# Altium PCB HLK-TX510_2.8_KIT_V1.1.PcbDoc (part 1 of 2)
Units mm, origin at the board's own origin, x right, y up, seen from the top; angles counter-clockwise.
Board outline 64 x 95.97 mm, 4 copper layers (Top Layer, GND, PWR, Bottom Layer), stack 0.537 mm thick; 97 components, 82 nets, 456 pads, 366 vias.
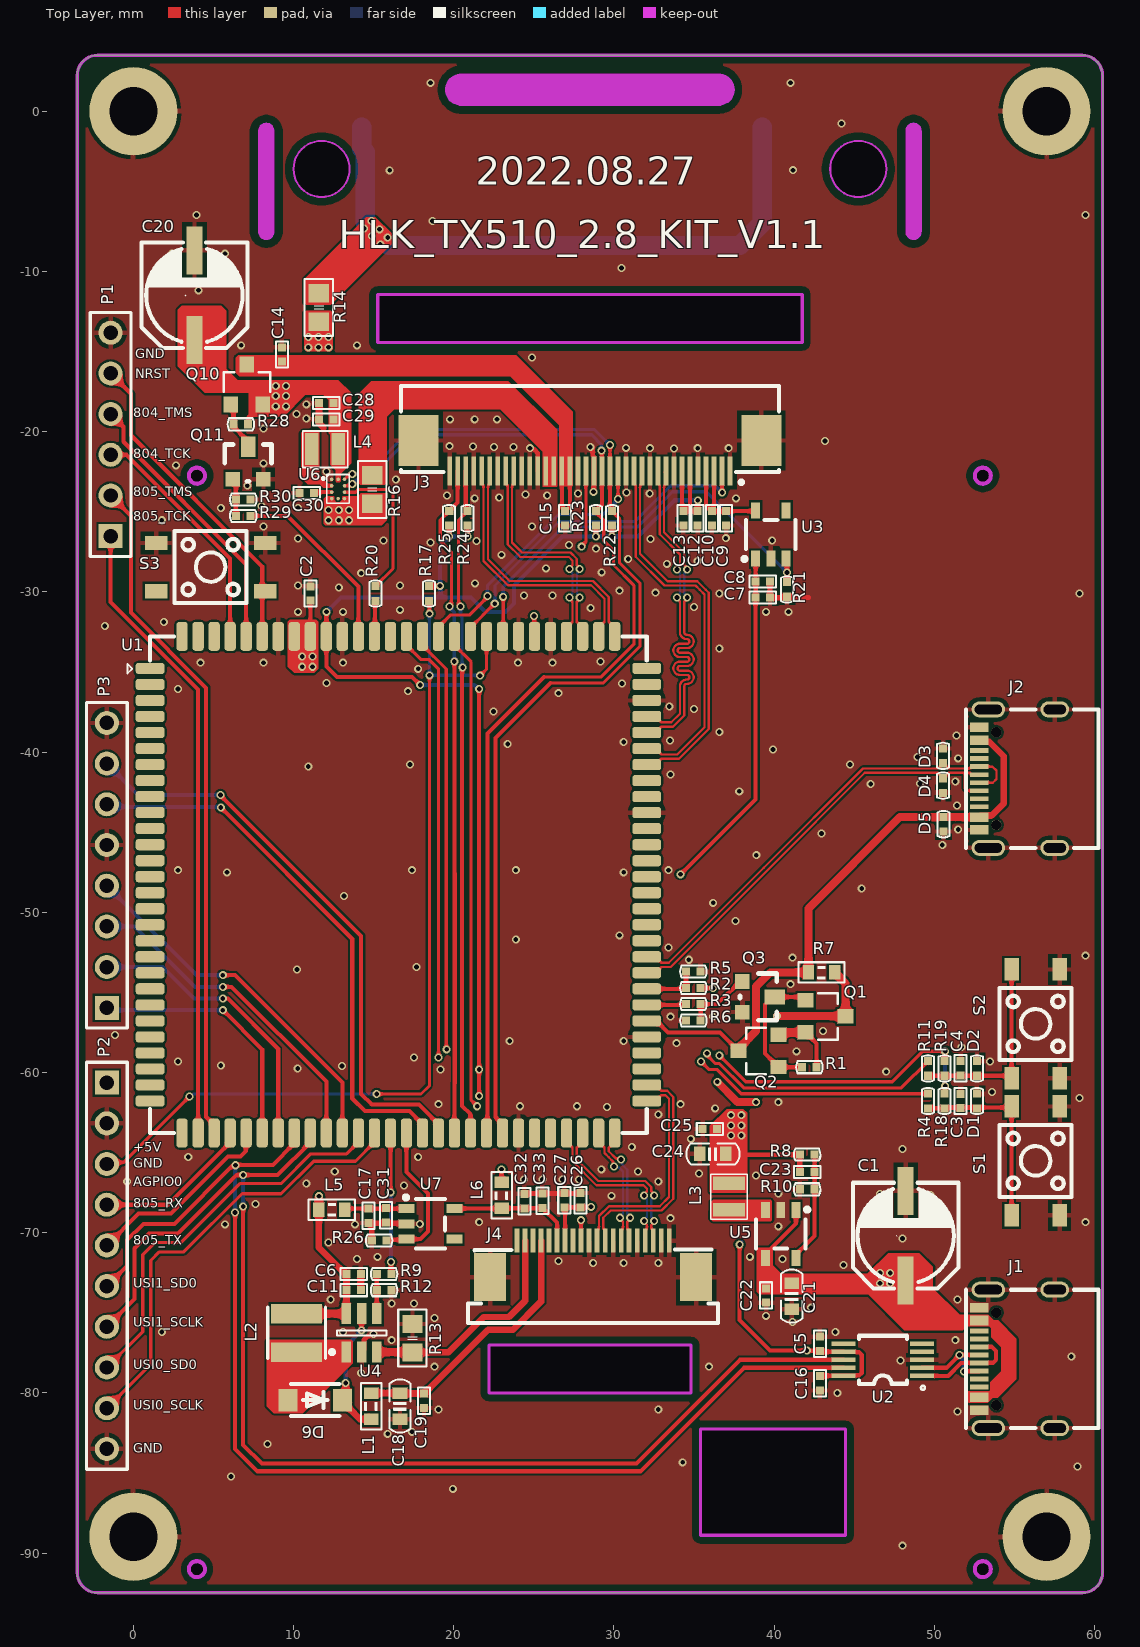
[diagram p0: Top Layer view]
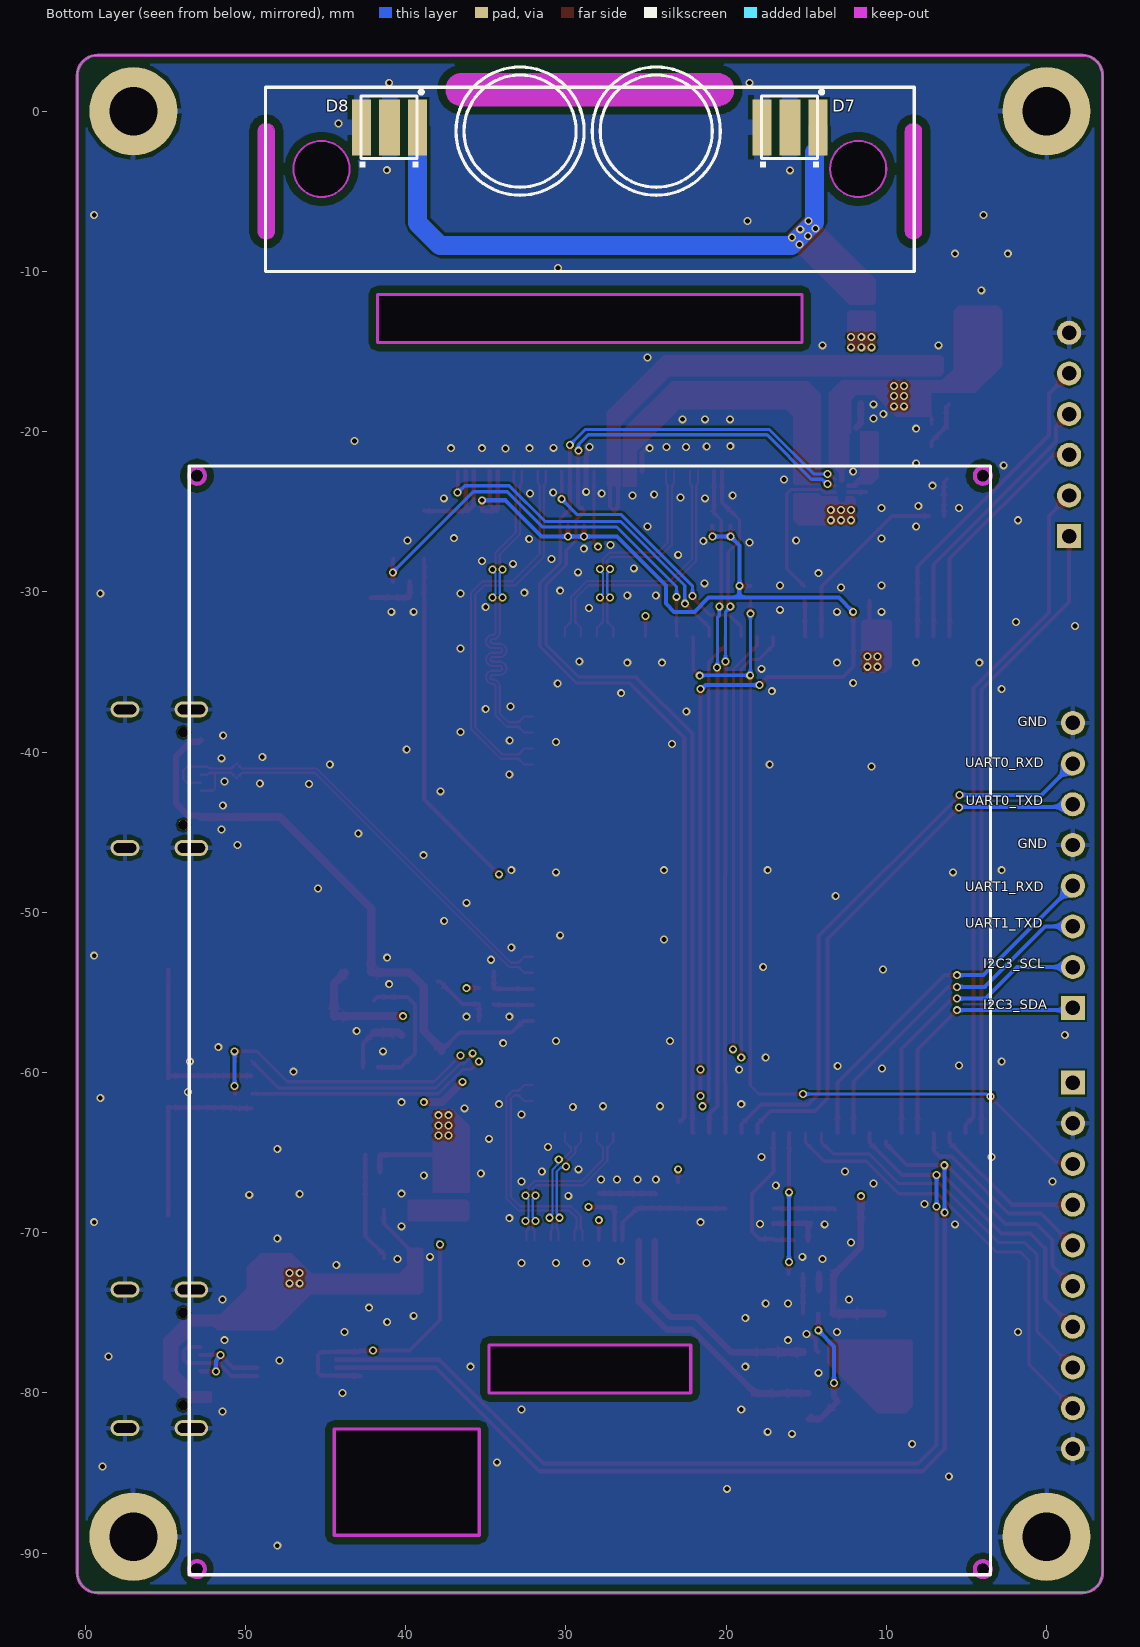
[diagram p1: Bottom Layer view, seen from below]
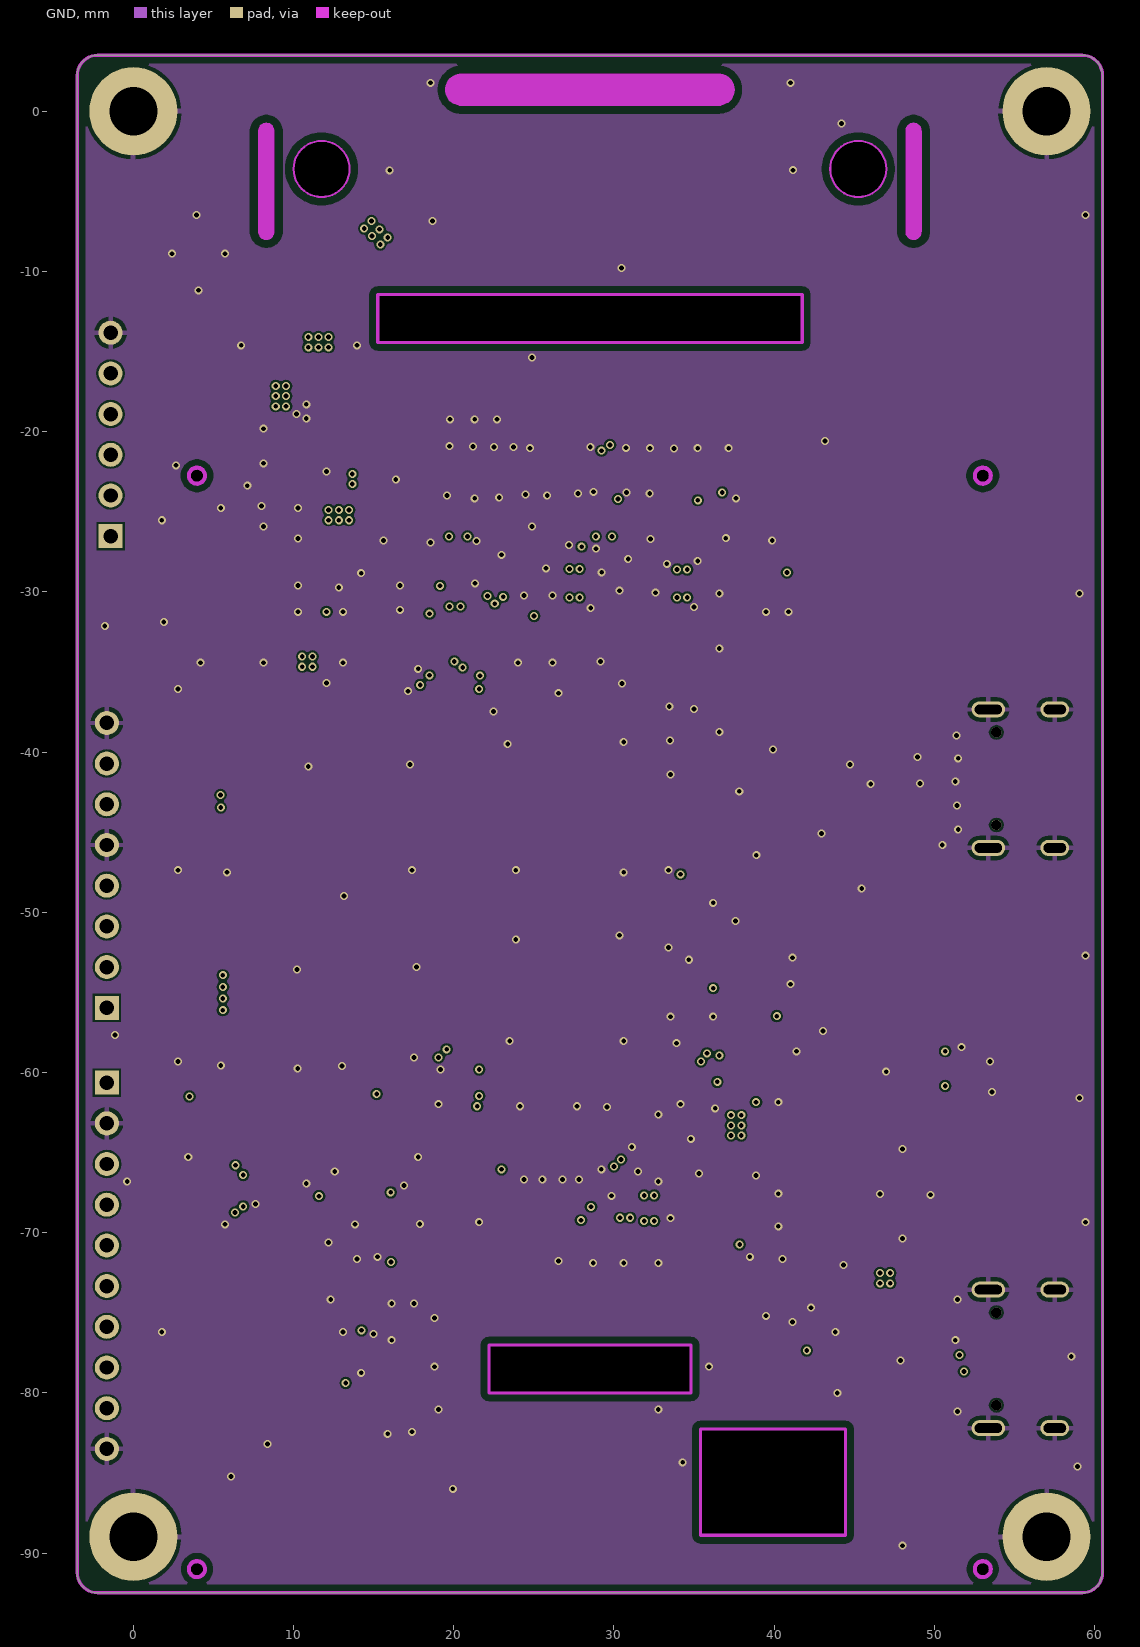
[diagram p2: GND]
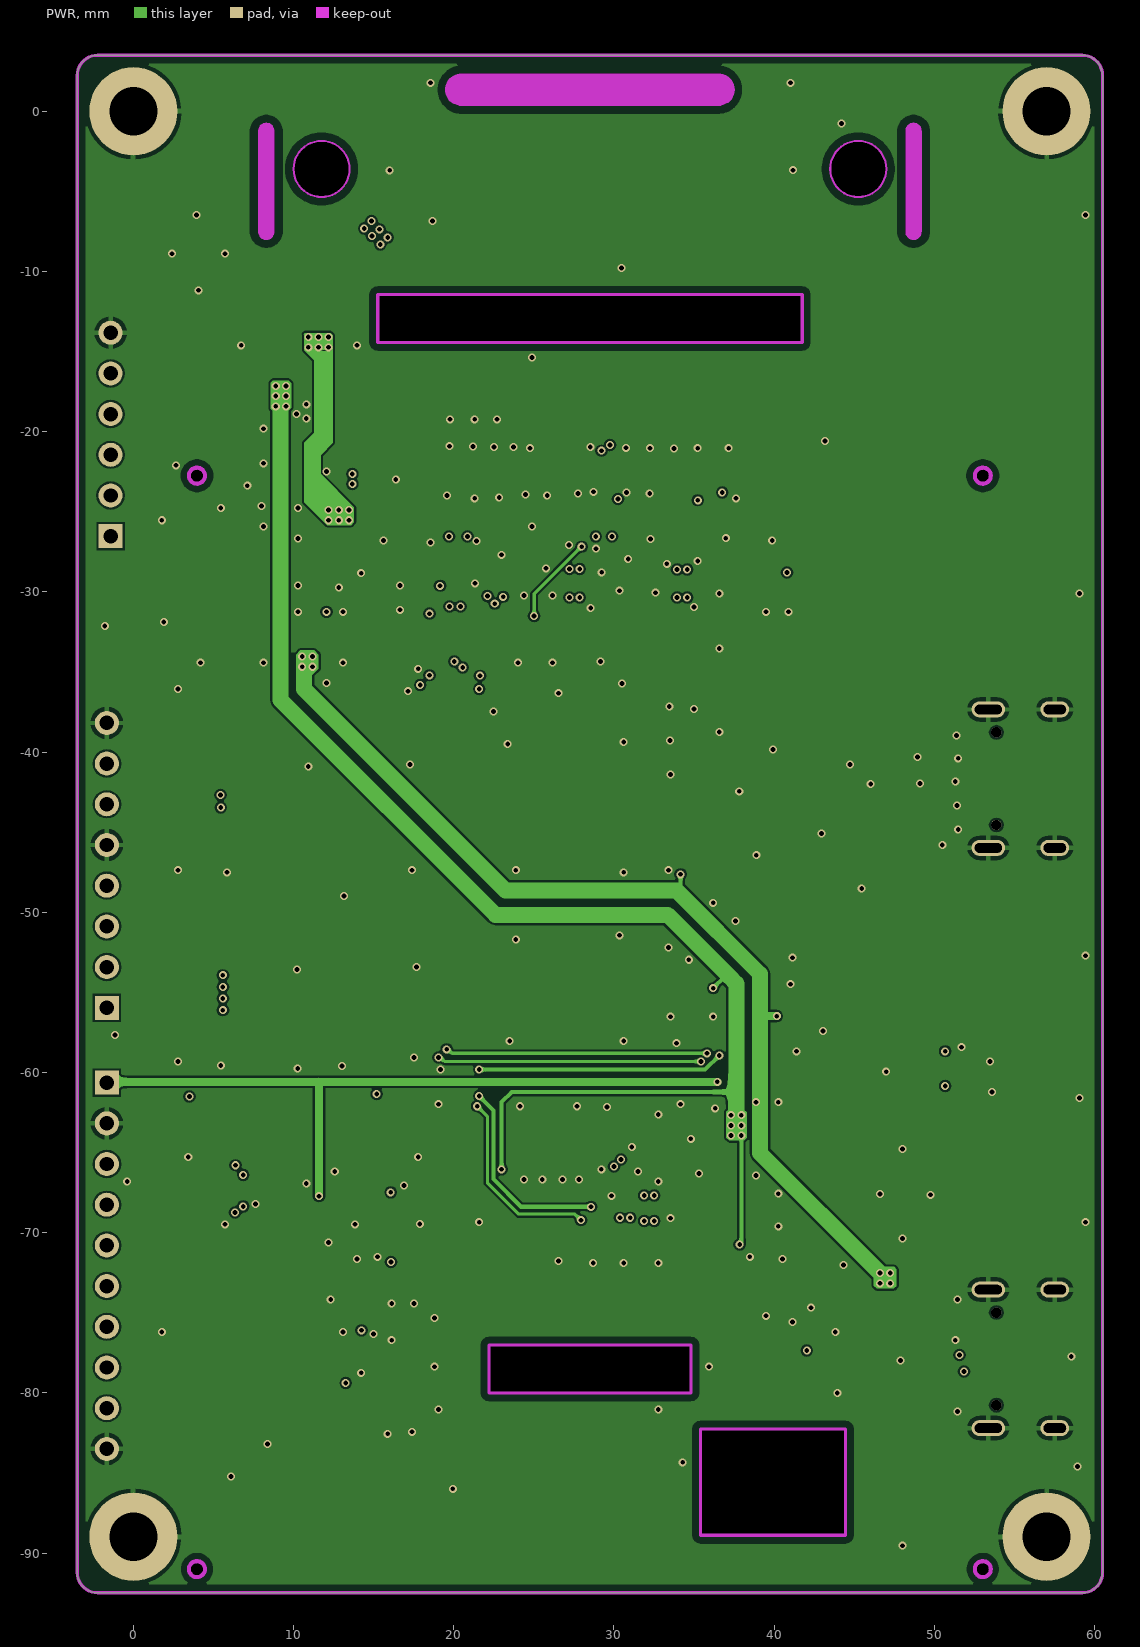
[diagram p3: PWR]

## Layer stack, top to bottom
Top Solder: solder mask 0.0102, Solder Resist, Dk 3.5
Top Layer: signal copper 0.0356
Dielectric 1: prepreg 0.0711, PP-006, Dk 4.1
GND: signal copper 0.035
Dielectric1: core 0.254, FR-4, Dk 4.2
PWR: signal copper 0.035
Dielectric 2: prepreg 0.0711, PP-006, Dk 4.1
Bottom Layer: signal copper 0.0356
Bottom Solder: solder mask 0.0102, Solder Resist, Dk 3.5

## Board outline
-3.502,-91.202 ccw(c-2.232,-91.202) -2.232,-92.472 59.228,-92.472 ccw(c59.228,-91.202) 60.498,-91.202 60.498,2.23 ccw(c59.228,2.23) 59.228,3.5 -2.232,3.5 ccw(c-2.232,2.23) -3.502,2.23
cut-out: 20.5,0.346 cw(c20.5,1.346) 20.5,2.347 36.5,2.347 cw(c36.5,1.346) 37.5,1.346 cw(c36.5,1.346) 36.5,0.346
cut-out: 43.5,-3.6 ccw(c45.25,-3.6) 45.25,-5.35 ccw(c45.25,-3.6) 47,-3.6 ccw(c45.25,-3.6) 45.25,-1.85 ccw(c45.25,-3.6)
cut-out: 10,-3.6 ccw(c11.75,-3.6) 11.75,-5.35 ccw(c11.75,-3.6) 13.5,-3.6 ccw(c11.75,-3.6) 11.75,-1.85 ccw(c11.75,-3.6)
cut-out: 48.2,-7.5 ccw(c48.7,-7.5) 49.2,-7.5 49.2,-1.25 ccw(c48.7,-1.25) 48.2,-1.25
cut-out: 7.8,-7.5 ccw(c8.3,-7.5) 8.8,-7.5 8.8,-1.25 ccw(c8.3,-1.25) 7.8,-1.25
cut-out: 3.473,-22.747 ccw(c3.973,-22.747) 3.973,-23.247 ccw(c3.973,-22.747) 4.473,-22.747 ccw(c3.973,-22.747) 3.973,-22.247 ccw(c3.973,-22.747)
cut-out: 52.523,-22.747 ccw(c53.023,-22.747) 53.023,-23.247 ccw(c53.023,-22.747) 53.523,-22.747 ccw(c53.023,-22.747) 53.023,-22.247 ccw(c53.023,-22.747)
cut-out: 3.473,-90.997 ccw(c3.973,-90.997) 3.973,-91.497 ccw(c3.973,-90.997) 4.473,-90.997 ccw(c3.973,-90.997) 3.973,-90.497 ccw(c3.973,-90.997)
cut-out: 52.523,-90.997 ccw(c53.023,-90.997) 53.023,-91.497 ccw(c53.023,-90.997) 53.523,-90.997 ccw(c53.023,-90.997) 53.023,-90.497 ccw(c53.023,-90.997)
cut-out: 22.2,-80.003 34.8,-80.003 34.8,-77.003 22.2,-77.003
cut-out: 35.4,-88.878 44.455,-88.878 44.455,-82.248 35.4,-82.248
cut-out: 15.258,-14.433 41.748,-14.433 41.748,-11.433 15.258,-11.433

## Design rules (kind name [scope] priority, off if disabled: settings)
BoardOutlineClearance [All] p1: gap=0.254 ignorepadtopadclearanceinfootprint=FALSE except(0: Arc-SplitContinuation Track-SplitContinuation SMDPad-SplitContinuation THPad-SplitContinuation Via-SplitContinuation Fill-SplitContinuation Poly-SplitContinuation Region-SplitContinuation Text-SplitContinuation; 0.508: Poly-OutlineEdge Poly-CavityEdge Poly-CutoutEdge Poly-SplitBarrior)
Clearance 90ohm [InNet('GND') vs InNetClass('90ohm')] p1: gap=0.127 ignorepadtopadclearanceinfootprint=FALSE except(0: Arc-Hole Track-Hole SMDPad-Hole THPad-Hole Via-Hole Fill-Hole Poly-Hole Region-Hole Text-Hole)
Clearance 100ohm [InNet('GND') vs InNetClass('100ohm')] p2: gap=0.127 ignorepadtopadclearanceinfootprint=FALSE except(0: Arc-Hole Track-Hole SMDPad-Hole THPad-Hole Via-Hole Fill-Hole Poly-Hole Region-Hole Text-Hole)
Clearance POLY [All vs OnLayer('Keep-Out Layer')] p3: gap=0.254 ignorepadtopadclearanceinfootprint=FALSE except(0: Arc-Hole Track-Hole SMDPad-Hole THPad-Hole Via-Hole Fill-Hole Poly-Hole Region-Hole Text-Hole)
Clearance GND [All vs InNet('GND')] p4 off: gap=0.127 ignorepadtopadclearanceinfootprint=FALSE except(0: Arc-Hole Track-Hole SMDPad-Hole THPad-Hole Via-Hole Fill-Hole Poly-Hole Region-Hole Text-Hole)
Clearance [All] p5: gap=0.127 ignorepadtopadclearanceinfootprint=FALSE except(0: Arc-Hole Track-Hole SMDPad-Hole THPad-Hole Via-Hole Fill-Hole Poly-Hole Region-Hole Text-Hole)
ComponentClearance "'Default' PADS rule_12" [All] p1: gap=0 collisioncheckmode=3 verticalgap=0.254 showdistances=FALSE
DiffPairsRouting DiffPair_90_DiffPairsRouting [InNetClass('90ohm')] p1: maxlimit=0.127 minlimit=0.127 mostfreqgap=0.127 toplayer_minwidth=0.051 toplayer_maxwidth=0.2 toplayer_prefwidth=0.2 midlayer1_minwidth=0.051 midlayer1_maxwidth=0.14 midlayer1_prefwidth=0.14 midlayer2_minwidth=0.051 midlayer2_maxwidth=0.14 midlayer2_prefwidth=0.14 bottomlayer_minwidth=0.051 bottomlayer_maxwidth=0.2 bottomlayer_prefwidth=0.2 maxuncoupledlength=12.7
DiffPairsRouting DiffPair_100_DiffPairsRouting [InNetClass('100ohm')] p2: maxlimit=0.127 minlimit=0.127 mostfreqgap=0.127 toplayer_minwidth=0.051 toplayer_maxwidth=0.14 toplayer_prefwidth=0.14 midlayer1_minwidth=0.051 midlayer1_maxwidth=0.14 midlayer1_prefwidth=0.14 midlayer2_minwidth=0.051 midlayer2_maxwidth=0.14 midlayer2_prefwidth=0.14 bottomlayer_minwidth=0.051 bottomlayer_maxwidth=0.14 bottomlayer_prefwidth=0.14 maxuncoupledlength=12.7
FabricationTestpoint [(IsPad And (OnTopLayer Or OnBottomLayer))] p1: side=3 testpointundercomponent=TRUE minsize=1.016 maxsize=2.54 preferedsize=1.524 minholesize=0 maxholesize=1.016 preferedholesize=0.813 testpointgrid=0.025 allowsidetop=TRUE allowsidebottom=TRUE usegrid=TRUE gridtolerance=0
FlightTimeFalling "'Default' PADS rule_6" [All] p1: maximum=10.00
FlightTimeRising "'Default' PADS rule_5" [All] p1: maximum=10.00
HoleSize [All] p1 off: absolutevalues=TRUE maxlimit=1 minlimit=0.2 maxpercent=80.000 minpercent=20.000
HoleToHoleClearance [All] p1 off: gap=0.254 allowstackedmicrovias=TRUE
LayerPairs [All] p1 off: enforce=TRUE
Length "'Default' PADS rule" [All] p1 off: maxlimit=1270 minlimit=0
MatchedLengths DiffPair_USBMatchedLengths [InDifferentialPair ('USB')] p1: tolerance=0.254 checknetsindiffpair=TRUE checkdiffpairvsdiffpair=FALSE checkxsignals=FALSE checkothers=FALSE
MatchedLengths [InDifferentialPair ('USB')] p2: tolerance=25.4 checknetsindiffpair=TRUE checkdiffpairvsdiffpair=FALSE checkxsignals=FALSE checkothers=FALSE
MatchedLengths "'Default' PADS rule_7" [InNetClass('All Nets')] p3 off: tolerance=5.08 checknetsindiffpair=TRUE checkdiffpairvsdiffpair=FALSE checkxsignals=FALSE checkothers=FALSE
MaxMinImpedance "'Default' PADS rule_4" [All] p1: minimum=50.00 maximum=150.0
MinimumSolderMaskSliver [All] p1: minsoldermaskwidth=0
ParallelSegment "'Default' PADS rule_3" [All] p1 off: limit=25.4 gap=5.08
ParallelSegment "'Default' PADS rule_2" [All] p2 off: limit=25.4 gap=5.08
PlaneClearance "PLANE CLE" [All] p1: clearance=0.127
PlaneConnect PLANE [All] p1: planeconnectstyle=Direct reliefexpansion=0.508 reliefentries=4 reliefconductorwidth=0.508 reliefairgap=0.254
PolygonConnect PolygonConnect_J1 [All vs HasPad('J1-A1B12')or haspad('J1-B1A12')] p1: connectstyle=Direct reliefconductorwidth=0.3 reliefentries=4 polygonreliefangle="90 Angle" airgapwidth=0.254
PolygonConnect PolygonConnect_U5 [InNet('GND') vs InComponent('U5')] p2: connectstyle=Direct reliefconductorwidth=0.3 reliefentries=4 polygonreliefangle="90 Angle" airgapwidth=0.254
PolygonConnect PolygonConnect_LED_IR [InNet('GND') vs HasFootprint('LED-3535-850MM')] p3: connectstyle=Relief reliefconductorwidth=1 reliefentries=4 polygonreliefangle="90 Angle" airgapwidth=0.254
PolygonConnect PolygonConnect_U6 [InNet('GND') vs InComponent('U6')] p4: connectstyle=Direct reliefconductorwidth=0.3 reliefentries=4 polygonreliefangle="90 Angle" airgapwidth=0.254
PolygonConnect PolygonConnect_via [All vs IsVia] p5: connectstyle=Direct reliefconductorwidth=0.254 reliefentries=4 polygonreliefangle="90 Angle" airgapwidth=0.254
PolygonConnect [All] p6: connectstyle=Relief reliefconductorwidth=0.3 reliefentries=4 polygonreliefangle="90 Angle" airgapwidth=0.254
RoutingLayers "'Default' PADS rule_10" [All] p1: top layer_v5=TRUE mid layer 1_v5=TRUE mid layer 2_v5=TRUE bottom layer_v5=TRUE
RoutingPriority "'Default' PADS rule_9" [All] p1: routingpriority=3
RoutingTopology "'Default' PADS rule_8" [All] p1: topology=Shortest
RoutingVias VIA [All] p1: holewidth=0.3 width=0.5 viastyle="Through Hole" minholewidth=0.2 minwidth=0.4 maxholewidth=0.3 maxwidth=0.5
SilkToSilkClearance [All] p1 off: silktosilkclearance=0.254
SilkToSolderMaskClearance [IsPad] p1 off: minsilkscreentomaskgap=0.127 clearancetoexposedcopper=TRUE
SolderMaskExpansion SolderMaskExpansion_1 [All] p1: expansion=0.051 istentingtop=FALSE
Width ALL [All] p1: maxlimit=5.08 minlimit=0.076 preferedwidth=0.089
16 further rules are at their usual default settings.

## Classes and differential pairs
component class 1-TX510_KIT: C1 C2 C5 C16 D3 D4 D5 J1 J2 P1 P2 P3 Q1 Q2 Q3 R1 R2 R3 R5 R6 R7 R17 S3 U1 U2
component class 2-LCD&CAMERA: C3 C4 C6 C7 C8 C9 C10 C11 C12 C13 C14 C15 C17 C18 C19 C20 C21 C22 C23 C24 C25 C26 C27 C28 C29 C30 C31 C32 C33 D1 D2 D6 D7 D8 J3 J4 L1 L2 L3 L4 L5 L6 Q10 Q11 Q12 Q13 R4 R8 R9 R10 R11 R12 R13 R14 R16 R18 R19 R20 R21 R22 R23 R24 R25 R26 R28 R29 R30 R31 R32 R33 S1 S2 U3 U4 U5 U6 U7
net class 100ohm: MIPI0_CLKN MIPI0_CLKP MIPI0_DATAN0 MIPI0_DATAP0 MIPI1_CLKN MIPI1_CLKP MIPI1_DATAN0 MIPI1_DATAP0 MIPI3_CLKN MIPI3_CLKP MIPI3_DATAN0 MIPI3_DATAN1 MIPI3_DATAP0 MIPI3_DATAP1
net class 90ohm: DM0 DP0
differential pair D: +D_P -D_N
differential pair D_MIPI0_: +MIPI0_DATAP0 -MIPI0_DATAN0
differential pair D_MIPI1_: +MIPI1_DATAP0 -MIPI1_DATAN0
differential pair D_CLK_MIPI0_: +MIPI0_CLKP -MIPI0_CLKN
differential pair D_CLK_MIPI1_: +MIPI1_CLKP -MIPI1_CLKN
differential pair D_MIPI0: +MIPI3_DATAP0 -MIPI3_DATAN0
differential pair D_MIPI1: +MIPI3_DATAP1 -MIPI3_DATAN1
differential pair D_CLK_MIPI3: +MIPI3_CLKP -MIPI3_CLKN
differential pair D_USB: +DP0 -DM0
differential pair D_MIPI3_1: +"" -""

## Components (designator, comment, footprint, x,y, rotation, side; value= is the part's Value field where it differs from the comment)
C1 "Cap Pol1" SMD,6.3x7.7mm 48.209,-70.18 r90 top value=220uF
C2 "100nF" C0402 11.049,-30.099 r270 top
C3 "100nF" C0402 51.643,-61.776 r90 top
C4 "100nF" C0402 51.643,-59.744 r90 top
C5 "100nF" C0402 42.85,-76.937 r270 top
C6 "2.2uF" C0402 13.747,-72.571 r0 top
C7 "2.2uF" C0402 39.286,-30.356 r0 top
C8 "100nF" C0402 39.286,-29.34 r0 top
C9 "2.2uF" C0402 37,-25.403 r270 top
C10 "100nF" C0402 36.111,-25.403 r270 top
C11 "100nF" C0402 13.747,-73.587 r0 top
C12 "2.2uF" C0402 35.222,-25.403 r270 top
C13 "100nF" C0402 34.333,-25.403 r270 top
C14 "2.2uF" C0402 9.271,-15.182 r90 top
C15 "100nF" C0402 26.955,-25.403 r270 top
C16 "100nF" C0402 42.85,-79.4 r270 top
C17 "2.2uF" C0402 14.681,-68.936 r270 top
C18 "4.7uF/25V" Cap_0603 16.65,-80.823 r270 top
C19 "100nF/25V" C0402 18.148,-80.493 r270 top
C20 "Cap Pol1" SMD,6.3x7.7mm 3.815,-11.484 r90 top value=220uF
C21 "10uF" Cap_0603 41.097,-73.965 r270 top
C22 "100nF" C0402 39.497,-73.914 r270 top
C23 "22pF" C0402 42.063,-66.218 r180 top
C24 "22uF" CAP_0603 36.17,-65.075 r180 top
C25 "100nF" C0402 35.992,-63.525 r180 top
C26 "2.2uF" C0402 27.915,-67.97 r90 top
C27 "100nF" C0402 26.899,-67.97 r90 top
C28 "10uF" C0402 12.045,-18.215 r180 top
C29 "100nF" C0402 12.045,-19.231 r180 top
C30 "10uF" C0402 10.826,-23.828 r180 top
C31 "100nF" C0402 15.773,-68.91 r270 top
C32 "2.2uF" C0402 24.409,-68.021 r90 top
C33 "100nF" C0402 25.527,-67.996 r90 top
D1 "ESDA-05N" R0402 52.659,-61.776 r270 top
D2 "ESDA-05N" R0402 52.659,-59.744 r270 top
D3 "ESDA-05N" R0402 50.546,-40.234 r270 top
D4 "ESDA-05N" R0402 50.546,-42.088 r90 top
D5 "ESDA-05N" R0402 50.571,-44.501 r90 top
D6 "SS14" SOD-123F 11.354,-80.442 r180 top
D7 "850NM" LED-3535-850MM 16.008,-1 r180 bottom
D8 "850NM" LED-3535-850MM 41,-1 r180 bottom
J1 "TYPE-C" TYPE-C16PIN 55.155,-77.873 r90 top
J2 "TYPE-C" TYPE-C16PIN 55.155,-41.656 r90 top
J3 "HS115-V2" 0.5-36PIN 28.498,-21.503 r180 top locked
J4 "2.8寸LCD FPC 20PIN" 0.5-20PIN-抽屉上接 28.702,-71.628 r0 top
L1 "300R@100MHz" Res_0603 14.846,-80.823 r270 top
L2 "22uH" L3*3 10.191,-76.254 r270 top
L3 "1.0uH" L2.5x2.0x1.0mm 37.186,-67.742 r270 top
L4 "1uH" L2.5x2.0x1.0mm 11.969,-21.085 r0 top
L5 "300R@100MHz" Res_0603 12.395,-68.555 r180 top
L6 "300R@100MHz" Res_0603 22.987,-67.666 r90 top
P1 "仿真器" HDR1X6 -1.417,-26.521 r90 top
P2 "串口" HDR1X10 -1.651,-60.63 r270 top
P3 "预留IO" HDR1X8 -1.651,-55.956 r90 top
Q1 "AO3415" SOT-23 43.211,-56.493 r270 top
Q2 "AO3415" SOT-23 39.02,-58.652 r90 top
Q3 "SS8050" SOT23-BEC 38.004,-54.334 r270 top
Q10 "AO3415" SOT-23 7.092,-17.046 r0 top
Q11 "SS8050" SOT23-BEC 6.228,-22.965 r0 top
R1 "100K" R0402 42.195,-59.668 r0 top
R2 "NC" R0402 34.956,-54.715 r0 top
R3 "1K" R0402 34.956,-55.731 r180 top
R4 "1K" R0402 49.611,-61.776 r270 top
R5 "10K" R0402 34.956,-53.699 r180 top
R6 "10K" R0402 34.956,-56.747 r0 top
R7 "NC" RES_0603 42.957,-53.749 r180 top
R8 "88.7K" R0402 42.063,-65.126 r180 top
R9 "0R" R0402 15.652,-72.571 r180 top
R10 "19.6K" R0402 42.063,-67.285 r180 top
R11 "1K" R0402 49.611,-59.744 r270 top
R12 "47K" R0402 15.652,-73.587 r180 top
R13 "10R" R0805 17.424,-77.47 r90 top
R14 "0.2R" R0805 11.582,-13.132 r90 top
R16 "0R" R0805 14.915,-24.489 r90 top
R17 "10K" R0402 18.466,-30.099 r90 top
R18 "10K" R0402 50.627,-61.776 r90 top
R19 "10K" R0402 50.627,-59.744 r90 top
R20 "0R" R0402 15.113,-30.099 r90 top
R21 "47K" R0402 40.798,-29.848 r90 top
R22 "2.7K" R0402 29.876,-25.403 r90 top
R23 "2.7K" R0402 28.872,-25.403 r90 top
R24 "2.7K" R0402 20.859,-25.403 r90 top
R25 "2.7K" R0402 19.716,-25.403 r90 top
R26 "47K" R0402 15.342,-70.485 r0 top
R28 "100K" R0402 6.711,-19.536 r0 top
R29 "1K" R0402 6.863,-25.251 r0 top
R30 "47K" R0402 6.863,-24.235 r0 top
S1 "SW-PB" 轻触开关4.5x4.5 56.316,-65.513 r90 top locked
S2 "SW-PB" 轻触开关4.5x4.5 56.316,-56.962 r90 top locked
S3 "SW-PB" 轻触开关4.5x4.5 4.826,-28.448 r0 top
U1 "HLK_TX510" "HLK_TX510 _KIT" 1.047,-34.776 r0 top locked
U2 "CH340E" MSOP-10 46.787,-77.927 r90 top
U3 "ME6212" SOT23-5 39.794,-26.419 r270 top
U4 "ME2214" SOT26 14.255,-76.254 r90 top
U5 "LP3219AB5F" SOT23-5 40.412,-70.079 r90 top
U6 "AW36518FCR" FCQFN-10L 12.781,-23.574 r0 top
U7 "ME6212" SOT23-5 18.542,-69.444 r180 top

## Footprints (in the part's own frame and the unit in brackets; to place one, negate y for a bottom-side part, rotate by r counter-clockwise, add the part's x,y. Pads: shape width x height; smd on the part's side, far side on the other; paste and mask are expansions set on the pad)
0.5-20PIN-抽屉上接 [mm] "抽屉上接"
  rect 0.3x1.5 smd: 1(-4.751,1.141) 2(-4.251,1.141) 3(-3.751,1.141) 4(-3.251,1.141) 5(-2.751,1.141) 6(-2.251,1.141) 7(-1.751,1.141) 8(-1.251,1.141) 9(-0.752,1.141) 10(-0.251,1.141) 11(0.249,1.141) 12(0.749,1.141) 13(1.249,1.141) 14(1.749,1.141) 15(2.245,1.14) 16(2.748,1.14) 17(3.248,1.142) 18(3.748,1.141) 19(4.248,1.141) 20(4.75,1.138)
  rect 2x3 smd: 21(-6.427,-1.141) 22(6.427,-1.142)
  silkscreen extent -7.8,-4 7.8,0.59
0.5-36PIN [mm]
  rect 0.3x1.8 smd: 1(-8.75,0.95) 2(-8.25,0.95) 3(-7.75,0.95) 4(-7.25,0.95) 5(-6.75,0.95) 6(-6.25,0.95) 7(-5.75,0.95) 8(-5.25,0.95) 9(-4.75,0.95) 10(-4.25,0.95) 11(-3.75,0.95) 12(-3.25,0.95) 13(-2.75,0.95) 14(-2.25,0.95) 15(-1.75,0.95) 16(-1.25,0.95) 17(-0.75,0.95) 18(-0.25,0.95) 19(0.25,0.95) 20(0.75,0.95) 21(1.25,0.95) 22(1.75,0.95) 23(2.25,0.95) 24(2.75,0.95) 25(3.25,0.95) 26(3.75,0.95) 27(4.25,0.95) 28(4.75,0.95) 29(5.25,0.95) 30(5.75,0.95) 31(6.25,0.95) 32(6.75,0.95) 33(7.25,0.95) 34(7.75,0.95) 35(8.25,0.95) 36(8.75,0.95)
  rect 2.5x3.2 smd: 37(10.7,-0.95) 38(-10.7,-0.95)
  silkscreen extent -11.8,-4.35 11.8,1.76
C0402 [mm]
  rect 0.5x0.5 smd: 1(-0.45,0) 2(0.45,0)
  silkscreen extent -0.82,-0.38 0.83,0.38
Cap_0603 [mil]
  rect 28x36 smd: 1(-32,0) 2(32,0)
  silkscreen extent -66,-26 65,26, body extent -31,-16 31,16, height 36
CAP_0603 [mil]
  rect 28x36 smd: 1(-32,0) 2(32,0)
  silkscreen extent -66,-26 65,26, body extent -31,-16 31,16, height 36
FCQFN-10L [mm]
  round 0.22 smd: A1(-0.4,0.6) A2(0,0.6) A3(0.4,0.6) B1(-0.4,0.2) B3(0.4,0.2) C1(-0.4,-0.2) C3(0.4,-0.2) D1(-0.4,-0.6) D2(0,-0.6) D3(0.4,-0.6)
  silkscreen extent -1,-0.9 0.7,0.9
HDR1X6 [mm] "Connector; Header; 6 Position"
  rect 1.5x1.5 hole 0.9: 1(0,0)
  round 1.5 hole 0.9: 2(2.54,0) 3(5.08,0) 4(7.62,0) 5(10.16,0) 6(12.7,0)
  silkscreen extent -1.27,-1.27 13.97,1.27
HDR1X8 [mm] "Connector; Header; 8 Position"
  rect 1.5x1.5 hole 0.9: 1(0,0)
  round 1.5 hole 0.9: 2(2.54,0) 3(5.08,0) 4(7.62,0) 5(10.16,0) 6(12.7,0) 7(15.24,0) 8(17.78,0)
  silkscreen extent -1.27,-1.27 19.05,1.27
HDR1X10 [mm] "Connector; Header; 10 Position"
  rect 1.5x1.5 hole 0.9: 1(0,0)
  round 1.5 hole 0.9: 2(2.54,0) 3(5.08,0) 4(7.62,0) 5(10.16,0) 6(12.7,0) 7(15.24,0) 8(17.78,0) 9(20.32,0) 10(22.86,0)
  silkscreen extent -1.27,-1.27 24.13,1.27
"HLK_TX510 _KIT" [mm] "模块封装"
  rrect50% 1.8x0.7 smd: 1(0,0) 2(0,-1) 3(0,-2) 4(0,-3) 5(0,-4) 6(0,-5) 7(0,-6) 8(0,-7) 9(0,-8) 10(0,-9) 11(0,-10) 12(0,-11) 13(0,-12) 14(0,-13) 15(0,-14) 16(0,-15) 17(0,-16) 18(0,-17) 19(0,-18) 20(0,-19) 21(0,-20) 22(0,-21) 23(0,-22) 24(0,-23) 25(0,-24) 26(0,-25) 27(0,-26) 28(0,-27) 57(31,-27) 58(31,-26) 59(31,-25) 60(31,-24) 61(31,-23) 62(31,-22) 63(31,-21) 64(31,-20) 65(31,-19) 66(31,-18) 67(31,-17) 68(31,-16) 69(31,-15) 70(31,-14) 71(31,-13) 72(31,-12) 73(31,-11) 74(31,-10) 75(31,-9) 76(31,-8) 77(31,-7) 78(31,-6) 79(31,-5) 80(31,-4) 81(31,-3) 82(31,-2) 83(31,-1) 84(31,0)
  rrect50% 0.7x1.8 smd: 29(2,-29) 30(3,-29) 31(4,-29) 32(5,-29) 33(6,-29) 34(7,-29) 35(8,-29) 36(9,-29) 37(10,-29) 38(11,-29) 39(12,-29) 40(13,-29) 41(14,-29) 42(15,-29) 43(16,-29) 44(17,-29) 45(18,-29) 46(19,-29) 47(20,-29) 48(21,-29) 49(22,-29) 50(23,-29) 51(24,-29) 52(25,-29) 53(26,-29) 54(27,-29) 55(28,-29) 56(29,-29) 85(29,2) 86(28,2) 87(27,2) 88(26,2) 89(25,2) 90(24,2) 91(23,2) 92(22,2) 93(21,2) 94(20,2) 95(19,2) 96(18,2) 97(17,2) 98(16,2) 99(15,2) 100(14,2) 101(13,2) 102(12,2) 103(11,2) 104(10,2) 105(9,2) 106(8,2) 107(7,2) 108(6,2) 109(5,2) 110(4,2) 111(3,2) 112(2,2)
  silkscreen extent -1.41,-29 31,2
L2.5x2.0x1.0mm [mm] "功率电感"
  rect 0.85x2 smd: 1(0.83,0) 2(-0.83,0)
  silkscreen extent -1.39,-1.15 1.41,1.13
L3*3 [mm]
  rect 1.2x3.2 smd: 1(-1.2,0) 2(1.2,0)
  silkscreen extent -1.62,-1.8 1.58,1.8
LED-3535-850MM [mm]
  rect 1.3x3.5 smd: 0(0,0)
  rect 1.2x3.5 smd: A(1.75,0) K(-1.75,0)
  silkscreen extent -1.88,-2.51 2.07,2.3
MSOP-10 [mil]
  rect 12x59.06 smd: 1(-39.37,-96.5) 2(-19.68,-96.5) 3(0,-96.5) 4(19.69,-96.5) 5(39.37,-96.5) 6(39.37,96.5) 7(19.69,96.5) 8(0,96.5) 9(-19.68,96.5) 10(-39.37,96.5)
  silkscreen extent -74,-103 59,59
R0402 [mil]
  rect 20x20 smd: 1(-18,0) 2(18,0)
  silkscreen extent -32,-15 32,15
R0805 [mil]
  rect 45x50 smd: 1(0,0) 2(70,0)
  silkscreen extent -35,-35 105,35, body extent -4,-25 74,25, height 22
Res_0603 [mil]
  rect 28x36 smd: 1(-32,0) 2(32,0)
  silkscreen extent -57,-25 57,25, body extent -31,-16 32,16, height 20
RES_0603 [mil]
  rect 28x36 smd: 1(-32,0) 2(32,0)
  silkscreen extent -57,-25 57,25, body extent -31,-16 32,16, height 20
SMD,6.3x7.7mm [mm] "贴片型铝电解电容器 6.3x7.7mm"
  rect 3x1 smd: 1(-2.8,0) 2(2.8,0)
  silkscreen extent -3.3,-3.3 3.3,3.3
SOD-123F [mm]
  rect 1.2x1.4 smd: 1(1.7,0) 2(-1.7,0)
  silkscreen extent -1.5,-1 1.5,1
SOT23-5 [mm]
  rect 1x0.55 smd: 1(1.5,-0.95) 2(1.5,0) 3(1.5,0.95) 4(-1.5,0.95) 5(-1.5,-0.95)
  silkscreen extent -0.9,-1.78 1.65,1.55
SOT23-BEC [mil]
  rect 36x36 smd: B(-0.5,0) E(74.5,0)
  rect 36x50 smd: C(37.5,80)
  silkscreen extent -21,-5 94,85, body extent -20,-15 94,95, height 47
SOT26 [mm]
  rect 1.3x0.6 smd: 1(-1.195,0.955) 2(-1.195,0.005) 3(-1.195,-0.945) 4(1.205,-0.945) 5(1.205,0.005) 6(1.205,0.955)
  silkscreen extent -1.32,-1.54 0.15,1.98, body extent -1.39,-1.42 1.41,1.48, height 1.2
SOT-23 [mm]
  rect 0.9x1 smd: 1(-1,-1.25) 2(1,-1.25) 3(0,1.25)
  silkscreen extent -1.45,-0.45 1.45,0.75, body extent -1.45,-1.43 1.45,1.37, height 1.2
TYPE-C16PIN [mm]
  oval 1x2.099 hole 0.6 slot 1.7 at 90 deg: 1(-4.32,1.787) 2(4.32,1.787)
  oval 1x1.799 hole 0.6 slot 1.4 at 90 deg: 3(-4.32,-2.362) 4(4.32,-2.362)
  rect 0.6x1.15 smd: A1B12(-3.2,2.362) A4B9(-2.4,2.362) B1A12(3.2,2.362) B4A9(2.4,2.362)
  rect 0.3x1.15 smd: A5(-1.25,2.362) A6(-0.25,2.362) A7(0.25,2.362) A8(-1.75,2.362) B5(1.75,2.362) B6(0.75,2.362) B7(-0.75,2.362) B8(1.25,2.362)
  round 0.65 hole 0.65 unplated: ""(-2.89,1.288) ""(2.89,1.288)
  silkscreen extent -4.32,-5.08 4.32,3.17
轻触开关4.5x4.5 [mm]
  rect 1.4x0.9 smd: 1(-3.4,1.5) 1(3.4,1.5) 2(-3.4,-1.5) 2(3.4,-1.5)
  silkscreen extent -2.25,-2.25 2.25,2.25

## Part data
C1 C20: "Polarized Capacitor (Radial)", LatestRevisionDate=17-Jul-2002, LatestRevisionNote="Re-released for DXP Platform.", PackageReference=RB7.6-15, Published=8-Jun-2000, Publisher="Altium Limited"
C2 C5 C6 C7 C8 C9 C10 C11 C12 C13 C14 C15 C16 C17 C18 C19 C21 C22 C23 C24 C25 C26 C27 C28 C29 C30 C31 C32 C33: library part CAP1, "C?"
C3 C4: library part Cap, "Capacitor", 物料名称=贴片电容, 物料编码=3.01.04.0056
D1 D2 D3 D4 D5 D6: library part "Diode BAS70", "Silicon AF Schottky Diode for High-Speed Switching", PackageDocument=Sep-2001, ComponentLink1Description="Manufacturer Link", ComponentLink1URL=http://www.infineon.com/, ComponentLink2Description=Datasheet, ComponentLink2URL=http://www.infineon.com/upload/Document/cmc_upload/documents/009/382/bas40_bas140series_1.pdf, DatasheetDocument=Oct-1999, Note="Pin 2 is not connected and not drawn.", PackageReference=SOT-23, Published=21-Mar-2003, Publisher="Altium Limited"
D7 D8: library part LED_IR, "贴片LED，3535，红外850NM"
J1 J2: library part TYPE-C16PIN
J4: "1-Lane MIPI"
L1 L5 L6: library part L/0402
L2 L3 L4: library part LineInductors
P1: library part "Header 6", "Header, 6-Pin", LatestRevisionDate=17-Jul-2002, LatestRevisionNote="Re-released for DXP Platform.", Publisher="Altium Limited"
P2: library part "Header 10", "Header, 10-Pin", LatestRevisionDate=17-Jul-2002, LatestRevisionNote="Re-released for DXP Platform.", Publisher="Altium Limited"
P3: library part "Header 8", "Header, 8-Pin", LatestRevisionDate=17-Jul-2002, LatestRevisionNote="Re-released for DXP Platform.", Publisher="Altium Limited"
Q3 Q11: library part NPN, "贴片三极管"
R1 R2 R3 R5 R6 R7 R17 R18 R19 R22 R23 R24 R25 R28 R29 R30: library part RES1, "R?"
R4 R8 R9 R10 R11 R12 R13 R14 R16 R20 R21 R26: library part Res2, "Resistor", LatestRevisionDate=17-Jul-2002, LatestRevisionNote="Re-released for DXP Platform.", PackageReference=AXIAL-0.4, Published=8-Jun-2000, Publisher="Altium Limited"
S1 S2 S3: "Switch", LatestRevisionDate=17-Jul-2002, LatestRevisionNote="Re-released for DXP Platform.", PackageDescription="Switch; 2 Leads", PackageReference=SPST-2, Published=24-Mar-1999, Publisher="Altium Limited"
U5: library part TD6817

## Free pads (board coordinates)
  round 5.5 hole 3: 0(0,-88.972) 0(0,0) 0(56.995,-88.972) 0(56.995,0)

## Via types
v1: diameter 0.5, hole 0.3, Top Layer to Bottom Layer, tented both sides, 366 vias

## Nets (pads, with @x,y where several pads share a name; then routed paths per layer and width w, separated by ;. In a path a pad name is that pad's centre, name@x,y a point inside that pad or via, vN(x,y) a via of type N, cw(c..) or ccw(c..) an arc to the next point about the centre after c; other vN are vias at no path point)
1V8_VDD: C12.1 C13.1 C26.1 C27.1 J3.6 J3.7 J4.7 R17.2 R18.2 R19.2 R22.1 R23.1 R24.1 R25.1 U1.103 | length 131.9
  Top Layer w0.2: v1(36.576,-58.928) 38.227,-60.579 47.371,-60.579 49.276,-58.674 v1(50.673,-58.674)
  Top Layer w0.254: v1(12.065,-31.242) 12.056,-31.251 12.056,-32.766 U1.103@12.047,-32.776 12.047,-34.653 12.7,-35.306 17.399,-35.306 v1(17.907,-35.814) ; R17.2@18.466,-29.642 18.478,-29.629 19.139,-29.629 v1(19.152,-29.616) ; v1@19.716,-26.543 R25.1@19.716,-25.86 ; v1@20.859,-26.543 R24.1@20.859,-25.86 ; v1(21.59,-61.468) v1(21.59,-59.817) v1(21.59,-36.068) ; C27.1@26.899,-68.42 C26.1@27.915,-68.42 27.936,-68.399 28.553,-68.399 v1(28.575,-68.377) ; J4.7@26.951,-70.487 C27.1@26.951,-68.622 ; v1@28.872,-26.543 R23.1@28.872,-25.86 ; v1@29.876,-26.543 R22.1@29.876,-25.86 ; J3.7@34.248,-22.453 34.248,-24.867 C13.1@34.333,-24.953 ; J3.6@34.748,-22.453 34.748,-24.539 C13.1@34.333,-24.953 ; v1(35.233,-24.28) 35.228,-24.285 35.228,-24.948 C12.1@35.222,-24.953 C13.1@34.333,-24.953 ; R18.2@50.627,-61.319 50.65,-61.296 50.65,-60.855 v1(50.673,-60.832) ; R19.2@50.627,-59.287 50.65,-59.264 50.65,-58.697 v1(50.673,-58.674)
  PWR w0.254: v1(21.59,-61.468) 22.479,-62.357 22.479,-66.65 24.206,-68.377 v1(28.575,-68.377) ; v1(21.59,-59.817) 35.687,-59.817 v1(36.576,-58.928)
  Bottom Layer w0.254: v1(12.065,-31.242) 12.954,-30.353 19.177,-30.353 ; v1(17.907,-35.814) 21.269,-35.814 21.523,-36.068 v1(21.59,-36.068) ; v1(20.853,-26.543) v1(19.71,-26.543) 19.152,-27.102 v1(19.152,-29.616) 19.177,-29.642 19.177,-30.353 ; v1(35.233,-24.28) 33.77,-24.28 31.507,-26.543 v1(29.87,-26.543) v1(28.867,-26.543) 26.797,-26.543 23.749,-29.591 23.749,-30.734 23.241,-31.242 21.971,-31.242 21.082,-30.353 19.177,-30.353 ; v1(50.673,-60.832) v1(50.673,-58.674)
3V3_VDD: C5.2 C16.1 C20.1 C23.2 C24.1 C25.1 C28.1 C29.1 L3.2 L4.1 L6.2 Q10.2 R2.2 R8.2 R28.2 U2.7 U2.10 U6.A2 | length 114.9
  Top Layer w0.2: R28.2@7.168,-19.536 7.168,-19.078 7.6,-18.647
  Top Layer w0.254: L6.2@22.987,-66.853 v1(22.987,-66.04) ; R2.2@35.413,-54.715 35.424,-54.726 36.184,-54.726 v1(36.195,-54.737) ; v1(37.846,-70.739) 37.846,-75.438 39.751,-77.343 v1(42.037,-77.343) 42.059,-77.365 42.828,-77.365 C5.2@42.85,-77.387 ; U2.7@44.333,-77.425 U2.7@44.336,-77.427 44.361,-77.452 45.3,-77.452 45.466,-77.619 45.466,-78.74 45.304,-78.902 44.361,-78.902 U2.10@44.336,-78.927
  Top Layer w0.3: C24.1@36.983,-65.075 37.033,-65.126 R8.2@41.605,-65.126 41.605,-66.211 C23.2@41.613,-66.218 ; C16.1@42.85,-78.95 42.871,-78.93 44.333,-78.93 U2.10@44.336,-78.927 ; C5.2@42.85,-77.387 42.888,-77.425 U2.7@44.333,-77.425
  PWR w0.254: v1(22.987,-66.04) 22.987,-61.849 23.622,-61.214 37.643,-61.214 ; v1(36.195,-54.737) 36.932,-54 ; v1@37.948,-70.571 v1(37.948,-63.932)
  PWR w1: 9.195,-18.085 9.195,-36.754 22.606,-50.165 33.35,-50.165 37.186,-54 37.643,-54.458 37.643,-61.214 37.643,-62.459
  Bottom Layer w0.254: v1(37.846,-70.739) 37.846,-70.672 v1@37.948,-70.571
  other v1: 37.313,-63.932 37.313,-63.297 37.948,-63.297 37.313,-62.662 37.948,-62.662 8.89,-18.415 9.525,-18.415 8.89,-17.78 9.525,-17.78 8.89,-17.145 9.525,-17.145
+3.3V: C32.1 C33.1 J4.6 L6.1 U7.5 | length 7.9
  Top Layer w0.254: U7.5@20.042,-68.494 20.05,-68.486 22.979,-68.486 L6.1@22.987,-68.478 ; L6.1@22.987,-68.471 C32.1@24.409,-68.471 25.552,-68.471 26.451,-69.37 J4.6@26.451,-70.487
AOGPIO0: P2.3 R17.1 U1.93 | length 58.2
  Top Layer w0.2: P2.3@-1.651,-65.71 -1.541,-65.6 -0.601,-65.6 v1(3.498,-61.501) ; v1(15.189,-61.341) 17.958,-61.341 18.491,-60.808 v1(18.491,-35.204) ; R17.1@18.466,-30.556 18.479,-30.57 v1(18.479,-31.357) ; v1(21.641,-35.23) 22.047,-34.824 U1.93@22.047,-32.776
  Bottom Layer w0.2: v1(3.498,-61.501) 3.579,-61.501 3.739,-61.341 v1(15.189,-61.341) ; v1(18.479,-31.357) 18.479,-35.192 v1(18.491,-35.204) 21.615,-35.204 v1(21.641,-35.23)
AVDD_2.8V: C9.1 C10.1 J3.3 J3.4 U3.5 | length 8
  Top Layer w0.254: J3.4@35.748,-22.453 35.748,-24.589 C10.1@36.111,-24.953 ; J3.3@36.248,-22.453 36.248,-24.817 C10.1@36.111,-24.953 ; U3.5@38.844,-24.919 38.81,-24.953 C9.1@37,-24.953 C10.1@36.111,-24.953
CK804_JTG_TCK: P1.3 U1.109 | length 15
  Top Layer w0.254: P1.3@-1.417,-21.441 -0.427,-21.441 6.047,-27.914 U1.109@6.047,-32.776
CK804_JTG_TMS: P1.4 U1.108 | length 17.4
  Top Layer w0.254: P1.4@-1.417,-18.901 -0.604,-19.713 -0.604,-20.628 7.047,-28.279 U1.108@7.047,-32.776
CK805_JTG_TCK: P1.1 U1.30 | length 39.5
  Top Layer w0.254: P1.1@-1.417,-26.521 -1.417,-26.851 -1.417,-30.635 4.047,-36.099 U1.30@4.047,-63.776
CK805_JTG_TMS: P1.2 U1.31 | length 42.5
  Top Layer w0.254: P1.2@-1.417,-23.981 -0.147,-25.251 -0.147,-31.296 4.548,-35.991 4.548,-62.77 5.047,-63.269 U1.31@5.047,-63.776
CK805_UART_RXD: P2.4 U1.32 | length 9.9
  Top Layer w0.254: P2.4@-1.651,-68.25 2.159,-68.25 5.824,-64.585 5.824,-64.575 6.047,-64.352 U1.32@6.047,-63.776
CK805_UART_TXD: P2.5 U1.33 | length 12.3
  Top Layer w0.254: P2.5@-1.651,-70.79 0.33,-68.809 2.362,-68.809 5.918,-65.253 6.68,-65.253 7.025,-64.908 7.025,-63.797 U1.33@7.047,-63.776
CLK_24MHZ_3: J3.19 U1.90 | length 11.7
  Top Layer w0.2: v1(25.019,-31.496) 25.019,-32.748 U1.90@25.047,-32.776 ; v1(27.985,-27.178) 27.985,-27.133 28.248,-26.87 J3.19@28.248,-22.453
  PWR w0.2: v1(25.019,-31.496) 25.019,-30.115 v1@27.956,-27.178
  Bottom Layer w0.2: v1@27.956,-27.178 v1(27.985,-27.178)
D_N: J1.A7 J1.B7 U2.2 | length 6
  Top Layer w0.254: U2.2@49.238,-78.427 50.757,-78.427 v1(51.562,-77.623) J1.A7@52.793,-77.623 ; v1(51.841,-78.664) 51.862,-78.643 52.772,-78.643 J1.B7@52.793,-78.623
  Bottom Layer w0.254: v1(51.562,-77.623) 51.562,-77.689 51.841,-77.969 v1(51.841,-78.664)
D_P: J1.A6 J1.B6 U2.1 | length 6.7
  Top Layer w0.254: U2.1@49.238,-78.927 50.865,-78.927 51.67,-78.123 J1.A6@52.793,-78.123 53.653,-78.123 53.848,-77.927 53.848,-77.368 53.602,-77.123 J1.B6@52.793,-77.123
DM0: D4.2 J2.A7 J2.B7 U1.65 | length 28.2
  Top Layer w0.14: U1.65@32.047,-53.776 32.592,-53.776 32.959,-53.409 33.537,-53.409 39.611,-47.334 45.652,-41.294 49.32,-41.294 50.209,-41.294 50.362,-41.446 D4.2@50.546,-41.631 50.887,-41.289 51.791,-41.289 ; J2.B7@52.793,-42.406 52.033,-42.406 51.892,-42.266 51.892,-41.377 51.878,-41.377 51.791,-41.289 ; J2.A7@52.793,-41.406 52.368,-41.406 52.251,-41.289 51.791,-41.289
DP0: D3.2 J2.A6 J2.B6 U1.66 | length 29.1
  Top Layer w0.14: U1.66@32.047,-52.776 32.592,-52.776 32.959,-53.142 33.426,-53.142 39.345,-47.224 45.541,-41.027 49.21,-41.027 50.209,-41.027 D3.2@50.546,-40.691 50.876,-41.021 52.253,-41.021 52.368,-40.906 J2.B6@52.793,-40.906 53.631,-40.906 53.873,-41.148 53.873,-41.681 53.649,-41.906 J2.A6@52.793,-41.906
DRVVBUS: R3.2 U1.63 | length 2.5
  Top Layer w0.254: U1.63@32.047,-55.776 34.453,-55.776 R3.2@34.498,-55.731